# Altium PCB STM32.PcbDoc (part 4 of 10)
Units mil, origin at the board's own origin, x right, y up, seen from the top; angles counter-clockwise.
Board outline 3925 x 3925 mil, 2 copper layers (Top Layer, Bottom Layer); 152 components, 142 nets, 670 pads, 189 vias.
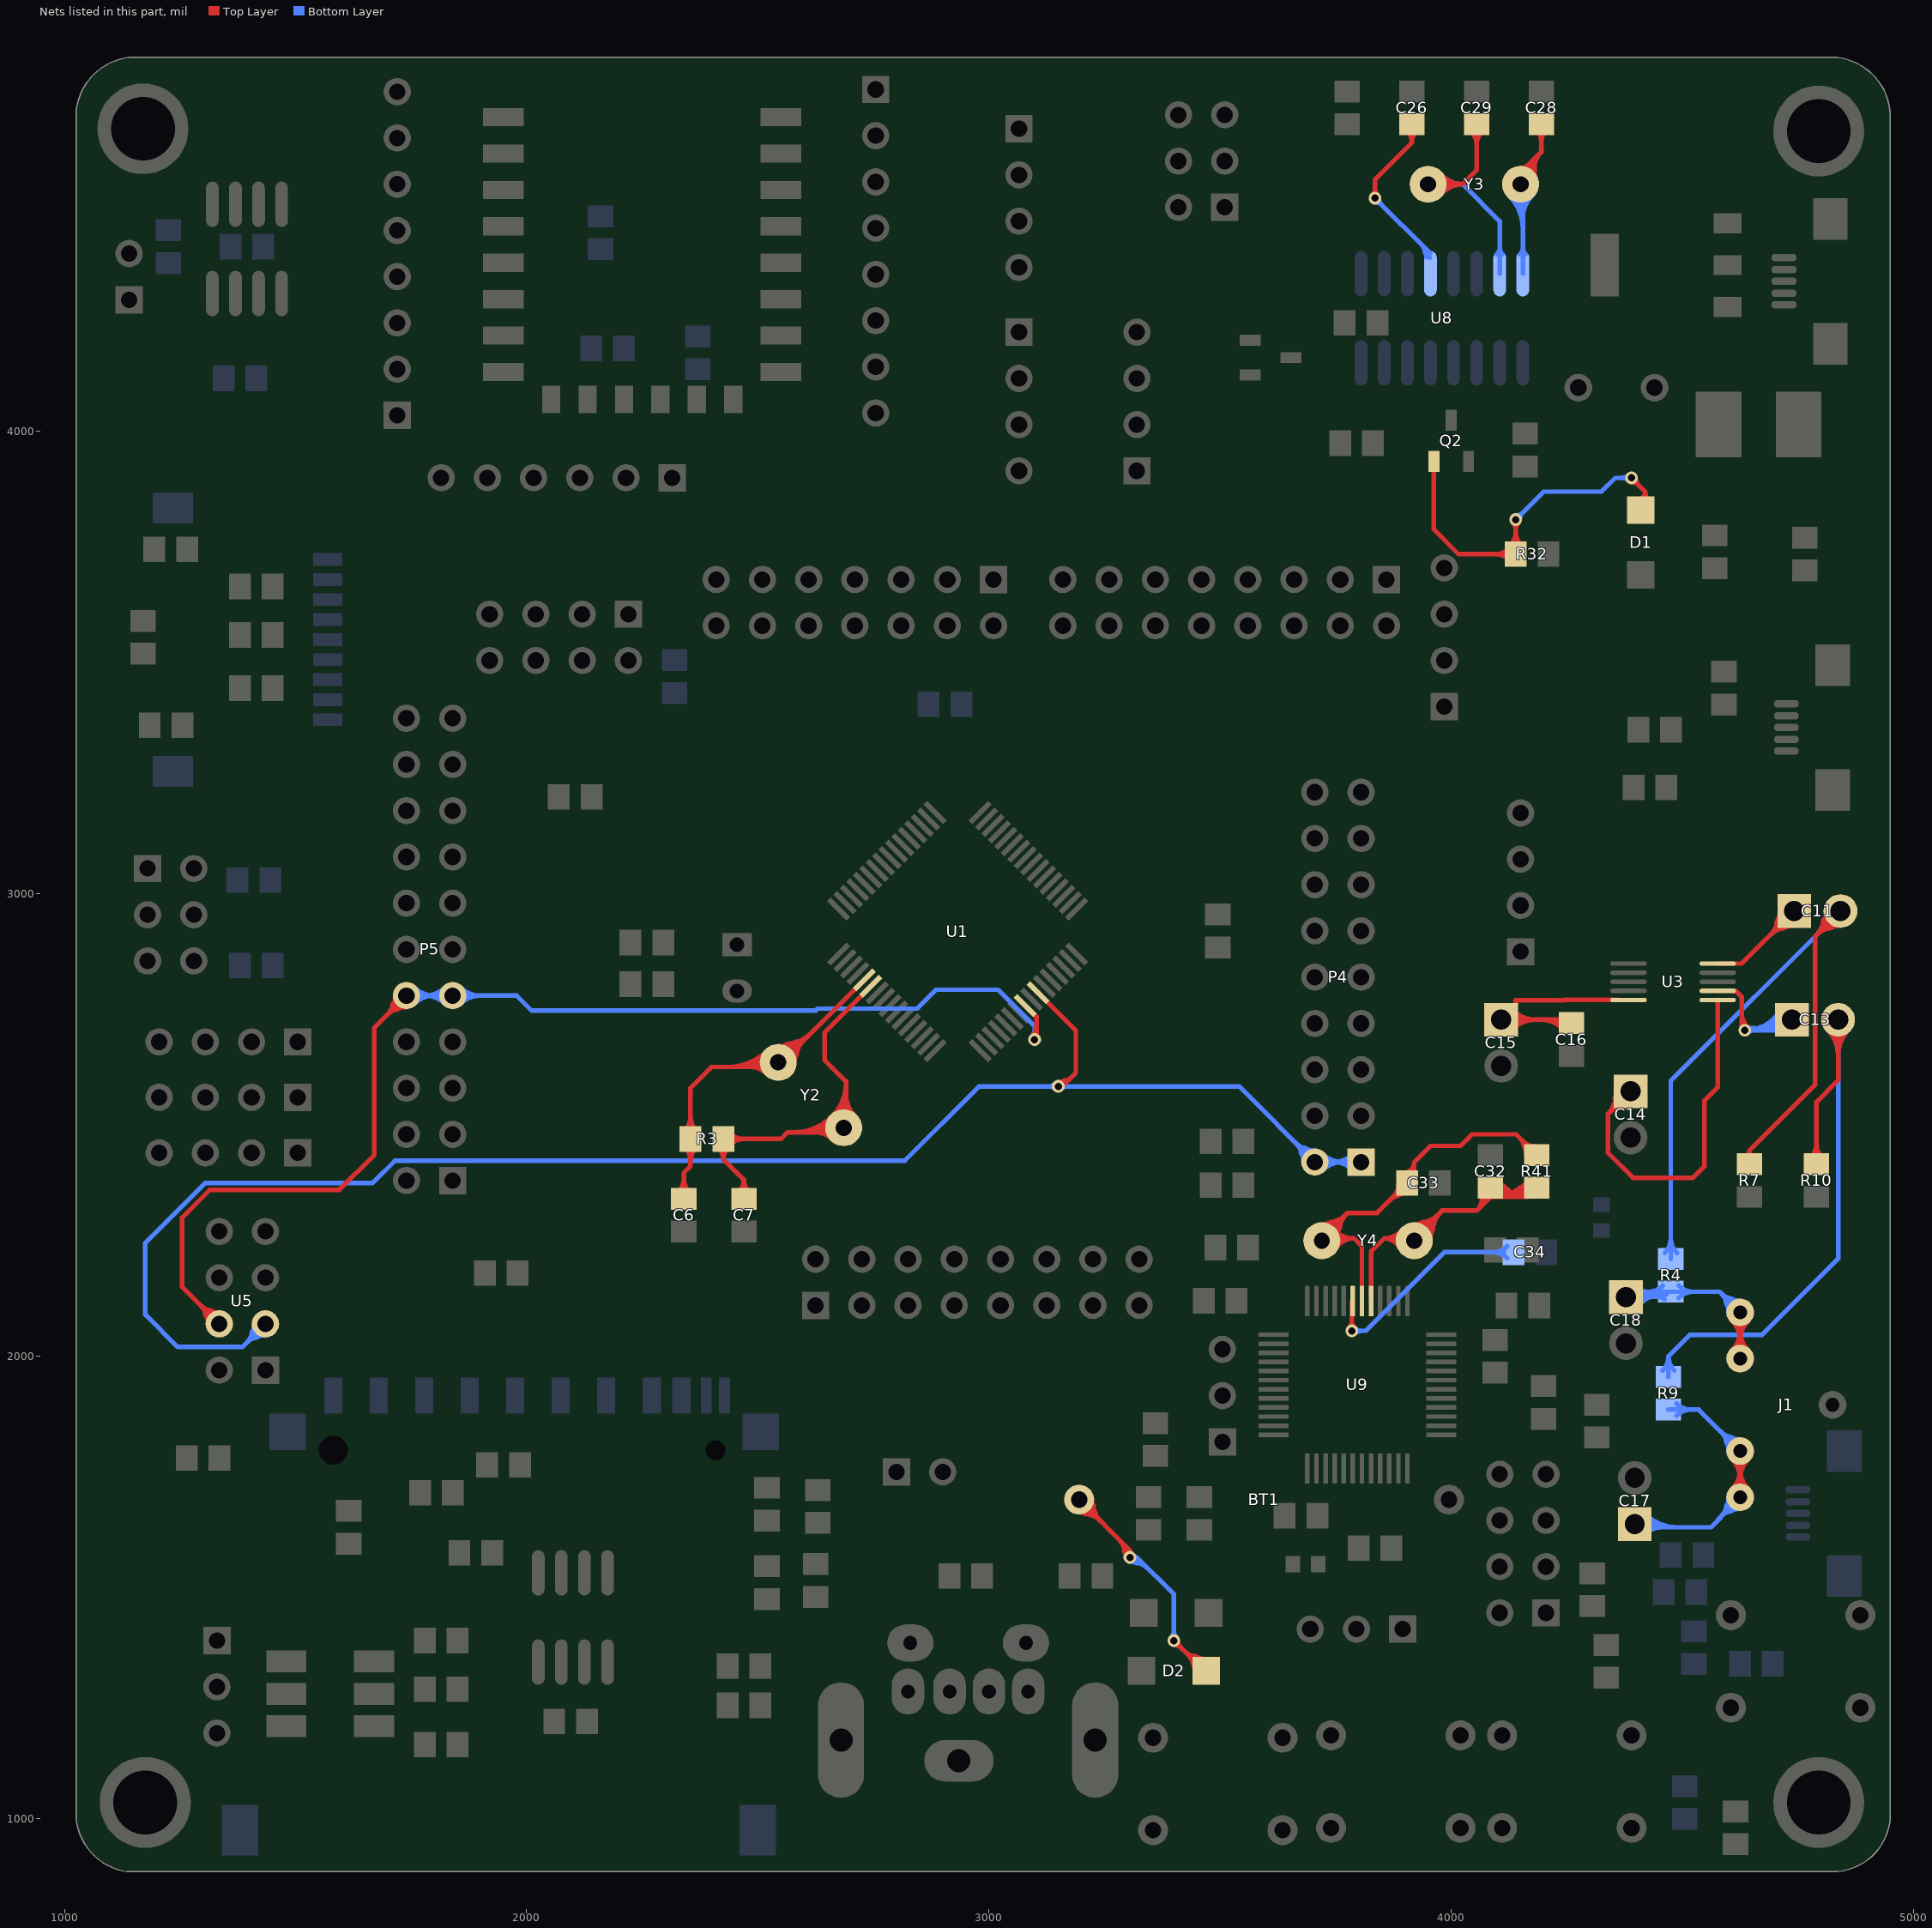
[diagram p4: the nets of this part, all layers, seen from the top]

## Via types
v1: diameter 27.56, hole 15.75, Top Layer to Bottom Layer, tented both sides, 185 vias
v2: diameter 39.37, hole 23.62, Top Layer to Bottom Layer, tented both sides, 3 vias
v3: diameter 39.37, hole 27.56, Top Layer to Bottom Layer, tented both sides, 1 vias

## Nets (pads, with @x,y where several pads share a name; then routed paths per layer and width w, separated by ;. In a path a pad name is that pad's centre, name@x,y a point inside that pad or via, vN(x,y) a via of type N, cw(c..) or ccw(c..) an arc to the next point about the centre after c; other vN are vias at no path point) (continued)
NCE: P4.1 P4.2 U1.26 U5.3 | length 5142.5
  Top Layer w10: U1.26@3106.5,2786.48 3187.99,2705 3187.99,2612.99 3154,2579 v1@3143.74,2579 ; v1@3148.91,2584.3 cw(c3169.61,2573.71) 3163.59,2596.16 ; v1@3150,2592.52 ccw(c3150,2634.82) 3179.91,2604.91 cw(c3150,2634.82) v1@3150,2592.52
  Bottom Layer w10: 1404.48,2047.65 cw(c1441.61,2037.7) U5.3@1433.9,2075.36 ; 1412.65,2039.48 ccw(c1402.7,2076.61) U5.3@1440.36,2068.9 ; U5.3@1435,2070 1385,2020 1245,2020 1175,2090 1175,2245 1305,2375 1667,2375 1715,2423 2818,2423 2978.74,2583.74 3541.26,2583.74 P4.2@3705,2420 P4.1@3805,2420 ; 3674.48,2442.35 ccw(c3711.61,2452.3) P4.2@3703.9,2414.64 ; 3682.65,2450.52 cw(c3672.7,2413.39) P4.2@3710.36,2421.1 ; 1393.13,2028.13 ccw(c1351.26,2070) 1410.47,2070 cw(c1351.26,2070) 1393.13,2028.13 ; 1393.13,2028.13 cw(c1435,1986.26) 1435,2045.47 ccw(c1435,1986.26) 1393.13,2028.13 ; 1410.2,2045.2 ccw(c1385.4,2070) 1420.47,2070 cw(c1385.4,2070) 1410.2,2045.2 ; 1410.2,2045.2 cw(c1435,2020.4) 1435,2055.47 ccw(c1435,2020.4) 1410.2,2045.2 ; 3128.8,2583.74 ccw(c3128.8,2604.94) 3143.79,2589.95 cw(c3128.8,2604.94) 3128.8,2583.74 ; 3128.8,2583.74 cw(c3128.8,2562.54) 3143.79,2577.53 ccw(c3128.8,2562.54) 3128.8,2583.74 ; 3171.2,2583.74 ccw(c3171.2,2562.54) 3156.21,2577.53 cw(c3171.2,2562.54) 3171.2,2583.74 ; 3171.2,2583.74 cw(c3171.2,2604.94) 3156.21,2589.95 ccw(c3171.2,2604.94) 3171.2,2583.74 ; 3663.13,2461.87 ccw(c3705,2503.74) 3705,2444.53 cw(c3705,2503.74) 3663.13,2461.87 ; 3663.13,2461.87 cw(c3621.26,2420) 3680.47,2420 ccw(c3621.26,2420) 3663.13,2461.87 ; 3680.2,2444.8 ccw(c3705,2469.6) 3705,2434.53 cw(c3705,2469.6) 3680.2,2444.8 ; 3680.2,2444.8 cw(c3655.4,2420) 3690.47,2420 ccw(c3655.4,2420) 3680.2,2444.8 ; 3740.07,2420 ccw(c3740.07,2384.93) 3715.27,2409.73 cw(c3740.07,2384.93) 3740.07,2420 ; 3740.07,2420 cw(c3740.07,2455.07) 3715.27,2430.27 ccw(c3740.07,2455.07) 3740.07,2420 ; 3745.79,2420 ccw(c3745.79,2479.21) 3787.66,2437.34 cw(c3745.79,2479.21) 3745.79,2420 ; 3745.79,2420 cw(c3745.79,2360.79) 3787.66,2402.66 ccw(c3745.79,2360.79) 3745.79,2420 ; 3764.21,2420 ccw(c3764.21,2360.79) 3722.34,2402.66 cw(c3764.21,2360.79) 3764.21,2420 ; 3764.21,2420 cw(c3764.21,2479.21) 3722.34,2437.34 ccw(c3764.21,2479.21) 3764.21,2420 ; 3769.93,2420 ccw(c3769.93,2455.07) 3794.73,2430.27 cw(c3769.93,2455.07) 3769.93,2420 ; 3769.93,2420 cw(c3769.93,2384.93) 3794.73,2409.73 ccw(c3769.93,2384.93) 3769.93,2420
  other v1: 3150,2583.74
NCS: P5.9 P5.10 U1.24 U5.4 | length 4452.2
  Top Layer w6: U1.24@3078.66,2758.64 U1.24@3099,2738.31
  Top Layer w10: 1304.48,2092.35 ccw(c1341.61,2102.3) U5.4@1333.9,2064.64 ; 1312.65,2100.52 cw(c1302.7,2063.39) U5.4@1340.36,2071.1 ; U5.4@1335,2070 1255,2150 1255,2300 1315,2360 1595,2360 1670,2435 1670,2710 P5.10@1740,2780 ; 1709.48,2757.65 cw(c1746.61,2747.7) P5.10@1738.9,2785.36 ; 1717.65,2749.48 ccw(c1707.7,2786.61) P5.10@1745.36,2778.9 ; v1(3098.78,2685) 3102.68,2688.9 3102.68,2734.63 U1.24@3099,2738.31 ; 1293.13,2111.87 ccw(c1335,2153.74) 1335,2094.53 cw(c1335,2153.74) 1293.13,2111.87 ; 1293.13,2111.87 cw(c1251.26,2070) 1310.47,2070 ccw(c1251.26,2070) 1293.13,2111.87 ; 1310.2,2094.8 ccw(c1335,2119.6) 1335,2084.53 cw(c1335,2119.6) 1310.2,2094.8 ; 1310.2,2094.8 cw(c1285.4,2070) 1320.47,2070 ccw(c1285.4,2070) 1310.2,2094.8 ; 1698.13,2738.13 ccw(c1656.26,2780) 1715.47,2780 cw(c1656.26,2780) 1698.13,2738.13 ; 1698.13,2738.13 cw(c1740,2696.26) 1740,2755.47 ccw(c1740,2696.26) 1698.13,2738.13 ; 1715.2,2755.2 ccw(c1690.4,2780) 1725.47,2780 cw(c1690.4,2780) 1715.2,2755.2 ; 1715.2,2755.2 cw(c1740,2730.4) 1740,2765.47 ccw(c1740,2730.4) 1715.2,2755.2 ; v1@3092.57,2691.21 ccw(c3068.16,2715.62) 3102.68,2715.62 cw(c3068.16,2715.62) v1@3092.57,2691.21 ; U1.24@3095.42,2740.7 cw(c3093.49,2731.71) 3102.68,2731.71 ccw(c3093.49,2731.71) U1.24@3095.42,2740.7
  Bottom Layer w10: P5.10@1740,2780 P5.9@1840,2780 1978.39,2780 2010.91,2747.48 2625,2747.48 2629.52,2752 2845,2752 2885.74,2792.74 2960.4,2792.74 ; 2970,2792.74 2960.4,2792.74 ; v1(3098.78,2685) 3098.78,2713.52 3019.56,2792.74 2960.4,2792.74 ; 1775.07,2780 ccw(c1775.07,2744.93) 1750.27,2769.73 cw(c1775.07,2744.93) 1775.07,2780 ; 1775.07,2780 cw(c1775.07,2815.07) 1750.27,2790.27 ccw(c1775.07,2815.07) 1775.07,2780 ; 1780.79,2780 ccw(c1780.79,2839.21) 1822.66,2797.34 cw(c1780.79,2839.21) 1780.79,2780 ; 1780.79,2780 cw(c1780.79,2720.79) 1822.66,2762.66 ccw(c1780.79,2720.79) 1780.79,2780 ; 1799.21,2780 ccw(c1799.21,2720.79) 1757.34,2762.66 cw(c1799.21,2720.79) 1799.21,2780 ; 1799.21,2780 cw(c1799.21,2839.21) 1757.34,2797.34 ccw(c1799.21,2839.21) 1799.21,2780 ; 1804.93,2780 ccw(c1804.93,2815.07) 1829.73,2790.27 cw(c1804.93,2815.07) 1804.93,2780 ; 1804.93,2780 cw(c1804.93,2744.93) 1829.73,2769.73 ccw(c1804.93,2744.93) 1804.93,2780 ; 1875.07,2780 ccw(c1875.07,2744.93) 1850.27,2769.73 cw(c1875.07,2744.93) 1875.07,2780 ; 1875.07,2780 cw(c1875.07,2815.07) 1850.27,2790.27 ccw(c1875.07,2815.07) 1875.07,2780 ; 1899.21,2780 ccw(c1899.21,2720.79) 1857.34,2762.66 cw(c1899.21,2720.79) 1899.21,2780 ; 1899.21,2780 cw(c1899.21,2839.21) 1857.34,2797.34 ccw(c1899.21,2839.21) 1899.21,2780 ; 3098.78,2706.2 ccw(c3119.97,2706.2) 3104.98,2691.21 cw(c3119.97,2706.2) 3098.78,2706.2 ; 3098.78,2706.2 cw(c3077.58,2706.2) 3092.57,2691.21 ccw(c3077.58,2706.2) 3098.78,2706.2
NetBT1_1: BT1.1 D2.1 | length 1974.3
  Top Layer w10: BT1.1@3182.78,1687.5 ccw(c3220.02,1695.12) 3210.19,1658.4 ; BT1.1@3192.58,1689.5 ccw(c3237.75,1698.75) 3225.82,1654.22 ; BT1.1@3195,1690 3305,1580 ; BT1.1@3195.5,1692.42 cw(c3186.25,1647.25) 3230.78,1659.18 ; BT1.1@3197.5,1702.22 cw(c3189.88,1664.98) 3226.6,1674.81 ; 3292.27,1579.73 ccw(c3317.39,1586.47) v1@3304.39,1563.94 ; v1@3299.67,1571.98 ccw(c3295.25,1577.77) 3302.29,1579.66 ccw(c3311.52,1582.13) v1@3308.12,1573.21 ; v1(3305,1565) 3305,1580 ; v1@3398.8,1384.76 ccw(c3412.87,1387.64) 3409.15,1373.77 ; v1(3400,1385) 3465,1320 D2.1@3470,1320 ; v1@3400.24,1386.2 cw(c3397.36,1372.13) 3411.23,1375.85 ; 3439.28,1341.33 ccw(c3473.93,1350.61) D2.1@3469.36,1315.04 ; 3443.97,1351.98 cw(c3432.65,1309.73) D2.1@3474.82,1321.33 ; 3224.92,1660.08 ccw(c3195,1630.16) 3195,1672.47 cw(c3195,1630.16) 3224.92,1660.08 ; 3224.92,1660.08 cw(c3254.84,1690) 3212.53,1690 ccw(c3254.84,1690) 3224.92,1660.08 ; 3241.99,1643.01 ccw(c3195,1596.02) 3195,1662.47 cw(c3195,1596.02) 3241.99,1643.01 ; 3241.99,1643.01 cw(c3288.98,1690) 3222.53,1690 ccw(c3288.98,1690) 3241.99,1643.01 ; 3305,1580 ccw(c3313.42,1580) 3309.3,1572.66 cw(c3313.42,1580) 3305,1580 ; 3305,1580 cw(c3296.58,1580) 3300.7,1572.66 ccw(c3296.58,1580) 3305,1580 ; 3414.99,1370.01 ccw(c3400,1355.02) 3400,1376.22 cw(c3400,1355.02) 3414.99,1370.01 ; 3414.99,1370.01 cw(c3429.98,1385) 3408.78,1385 ccw(c3429.98,1385) 3414.99,1370.01 ; 3279.41,1605.59 cw(c3238.81,1565) 3296.22,1565 ccw(c3238.81,1565) 3279.41,1605.59 ; 3296.48,1588.52 cw(c3272.95,1565) 3306.22,1565 ccw(c3272.95,1565) 3296.48,1588.52 ; 3418.79,1366.21 ccw(c3470,1417.43) 3470,1345 cw(c3470,1417.43) 3418.79,1366.21 ; 3430.86,1354.14 cw(c3396.72,1320) 3445,1320 ccw(c3396.72,1320) 3430.86,1354.14 ; 3435.86,1349.14 ccw(c3470,1383.28) 3470,1335 cw(c3470,1383.28) 3435.86,1349.14
  Bottom Layer w10: v1@3303.94,1564.39 ccw(c3326.47,1577.39) 3319.73,1552.27 ; v1(3305,1565) 3320,1565 ; v1@3311.98,1559.67 cw(c3317.77,1555.25) 3319.66,1562.29 cw(c3322.13,1571.52) v1@3313.21,1568.12 ; v1(3400,1385) 3400,1485 3320,1565 ; 3320,1565 ccw(c3320,1556.58) 3312.66,1560.7 cw(c3320,1556.58) 3320,1565 ; 3320,1565 cw(c3320,1573.42) 3312.66,1569.3 ccw(c3320,1573.42) 3320,1565 ; 3400,1406.2 ccw(c3421.2,1406.2) 3406.21,1391.21 cw(c3421.2,1406.2) 3400,1406.2 ; 3400,1406.2 cw(c3378.8,1406.2) 3393.79,1391.21 ccw(c3378.8,1406.2) 3400,1406.2 ; v1@3305,1556.22 cw(c3305,1498.81) 3345.59,1539.41 ccw(c3305,1498.81) v1@3305,1556.22 ; v1@3305,1566.22 cw(c3305,1532.95) 3328.52,1556.48 ccw(c3305,1532.95) v1@3305,1566.22
NetC6_2: C6.2 R3.1 U1.5 Y2.1 | length 3173
  Top Layer w10: C6.2@2340,2340.43 2340,2397 2354.57,2411.57 R3.1@2354.57,2470 2354.57,2580.28 2400,2625.71 ; Y2.1@2529.96,2640.16 cw(c2581.87,2624.04) 2568.77,2676.79 ; Y2.1@2539.52,2637.19 cw(c2601.68,2617.89) 2586,2681.06 ; Y2.1@2544.88,2630.75 ccw(c2538.86,2681.22) 2587.96,2668.06 ; Y2.1@2546.07,2620.82 ccw(c2540.75,2665.42) 2584.14,2653.79 ; Y2.1@2549.24,2635.02 cw(c2591.59,2629.12) 2580.53,2670.42 ; U1.5@2730.68,2814.32 2549.29,2632.93 Y2.1@2549.29,2625.71 ; 2340,2385.39 ccw(c2384.96,2385.39) 2353.17,2353.6 cw(c2384.96,2385.39) 2340,2385.39 ; 2340,2385.39 cw(c2295.04,2385.39) 2326.83,2353.6 ccw(c2295.04,2385.39) 2340,2385.39 ; 2354.57,2421.11 ccw(c2309.61,2421.11) 2341.4,2452.9 cw(c2309.61,2421.11) 2354.57,2421.11 ; 2354.57,2421.11 cw(c2399.53,2421.11) 2367.74,2452.9 ccw(c2399.53,2421.11) 2354.57,2421.11 ; 2354.57,2518.9 ccw(c2399.53,2518.9) 2367.74,2487.11 cw(c2399.53,2518.9) 2354.57,2518.9 ; 2354.57,2518.9 cw(c2309.61,2518.9) 2341.4,2487.11 ccw(c2309.61,2518.9) 2354.57,2518.9 ; 2400,2625.71 Y2.1@2549.29,2625.71 ; 2400,2625.71 Y2.1@2549.29,2625.71 ; 2435.65,2625.71 ccw(c2435.65,2744.35) Y2.1@2519.54,2660.46 ; 2435.65,2625.71 ccw(c2435.65,2744.35) Y2.1@2519.54,2660.46 ; 2435.65,2625.71 ccw(c2435.65,2744.35) Y2.1@2519.54,2660.46 ; 2435.65,2625.71 ccw(c2435.65,2744.35) Y2.1@2519.54,2660.46 ; 2459.79,2625.71 ccw(c2459.79,2720.21) Y2.1@2526.61,2653.39 ; 2459.79,2625.71 ccw(c2459.79,2720.21) Y2.1@2526.61,2653.39 ; 2459.79,2625.71 ccw(c2459.79,2720.21) Y2.1@2526.61,2653.39 ; 2459.79,2625.71 ccw(c2459.79,2720.21) Y2.1@2526.61,2653.39 ; 2483.93,2625.71 ccw(c2483.93,2696.07) Y2.1@2533.68,2646.32 ; 2483.93,2625.71 cw(c2483.93,2575.36) Y2.1@2519.54,2610.96 ; 2483.93,2625.71 ccw(c2483.93,2696.07) Y2.1@2533.68,2646.32 ; 2483.93,2625.71 cw(c2483.93,2575.36) Y2.1@2519.54,2610.96 ; 2483.93,2625.71 ccw(c2483.93,2696.07) Y2.1@2533.68,2646.32 ; 2483.93,2625.71 cw(c2483.93,2575.36) Y2.1@2519.54,2610.96 ; 2483.93,2625.71 ccw(c2483.93,2696.07) Y2.1@2533.68,2646.32 ; 2483.93,2625.71 cw(c2483.93,2575.36) Y2.1@2519.54,2610.96 ; Y2.1@2544.29,2650.71 ccw(c2544.29,2705.7) 2583.17,2666.82 cw(c2544.29,2705.7) Y2.1@2544.29,2650.71 ; Y2.1@2544.29,2660.71 ccw(c2544.29,2739.84) 2600.24,2683.89 cw(c2544.29,2739.84) Y2.1@2544.29,2660.71 ; Y2.1@2544.29,2670.71 ccw(c2544.29,2773.98) 2617.31,2700.96 cw(c2544.29,2773.98) Y2.1@2544.29,2670.71 ; Y2.1@2569.29,2635.71 cw(c2610.87,2635.71) 2581.47,2665.11 ccw(c2610.87,2635.71) Y2.1@2569.29,2635.71 ; Y2.1@2579.29,2635.71 cw(c2645.01,2635.71) 2598.54,2682.18 ccw(c2645.01,2635.71) Y2.1@2579.29,2635.71
NetC7_2: C7.2 R3.2 U1.6 Y2.2 | length 3539.3
  Top Layer w10: C7.2@2470,2340.43 2470,2382 ; U1.6@2744.6,2800.4 2645,2700.8 2645,2640 2690.71,2594.29 ; 2425.43,2426.57 ccw(c2392.86,2426.57) 2413.59,2451.7 cw(c2392.86,2426.57) 2425.43,2426.57 ; 2425.43,2426.57 cw(c2458.01,2426.57) 2437.28,2451.7 ccw(c2458.01,2426.57) 2425.43,2426.57 ; 2425.43,2426.57 2470,2382 ; 2425.43,2426.57 R3.2@2425.43,2470 2550,2470 2564.29,2484.29 ; 2470,2382 ccw(c2507.07,2382) 2482.4,2354.33 cw(c2507.07,2382) 2470,2382 ; 2470,2382 cw(c2432.93,2382) 2457.6,2354.33 ccw(c2432.93,2382) 2470,2382 ; 2470.39,2470 ccw(c2470.39,2425.04) 2438.6,2456.83 cw(c2470.39,2425.04) 2470.39,2470 ; 2470.39,2470 cw(c2470.39,2514.96) 2438.6,2483.17 ccw(c2470.39,2514.96) 2470.39,2470 ; 2564.29,2484.29 Y2.2@2690.71,2484.29 ; 2564.29,2484.29 Y2.2@2690.71,2484.29 ; 2577.07,2484.29 ccw(c2577.07,2602.93) Y2.2@2660.96,2519.04 ; 2577.07,2484.29 ccw(c2577.07,2602.93) Y2.2@2660.96,2519.04 ; 2577.07,2484.29 ccw(c2577.07,2602.93) Y2.2@2660.96,2519.04 ; 2577.07,2484.29 ccw(c2577.07,2602.93) Y2.2@2660.96,2519.04 ; 2601.21,2484.29 ccw(c2601.21,2578.79) Y2.2@2668.03,2511.97 ; 2601.21,2484.29 ccw(c2601.21,2578.79) Y2.2@2668.03,2511.97 ; 2601.21,2484.29 ccw(c2601.21,2578.79) Y2.2@2668.03,2511.97 ; 2601.21,2484.29 ccw(c2601.21,2578.79) Y2.2@2668.03,2511.97 ; 2625.35,2484.29 ccw(c2625.35,2554.65) Y2.2@2675.1,2504.9 ; 2625.35,2484.29 cw(c2625.35,2433.93) Y2.2@2660.96,2469.54 ; 2625.35,2484.29 ccw(c2625.35,2554.65) Y2.2@2675.1,2504.9 ; 2625.35,2484.29 cw(c2625.35,2433.93) Y2.2@2660.96,2469.54 ; 2625.35,2484.29 ccw(c2625.35,2554.65) Y2.2@2675.1,2504.9 ; 2625.35,2484.29 cw(c2625.35,2433.93) Y2.2@2660.96,2469.54 ; 2625.35,2484.29 ccw(c2625.35,2554.65) Y2.2@2675.1,2504.9 ; 2625.35,2484.29 cw(c2625.35,2433.93) Y2.2@2660.96,2469.54 ; Y2.2@2660.96,2519.04 ccw(c2589.14,2590.86) 2690.71,2590.86 ; Y2.2@2660.96,2519.04 ccw(c2589.14,2590.86) 2690.71,2590.86 ; Y2.2@2660.96,2519.04 ccw(c2589.14,2590.86) 2690.71,2590.86 ; Y2.2@2660.96,2519.04 ccw(c2589.14,2590.86) 2690.71,2590.86 ; Y2.2@2668.03,2511.97 ccw(c2613.28,2566.72) 2690.71,2566.72 ; Y2.2@2668.03,2511.97 ccw(c2613.28,2566.72) 2690.71,2566.72 ; Y2.2@2668.03,2511.97 ccw(c2613.28,2566.72) 2690.71,2566.72 ; Y2.2@2668.03,2511.97 ccw(c2613.28,2566.72) 2690.71,2566.72 ; Y2.2@2675.1,2504.9 ccw(c2637.43,2542.57) 2690.71,2542.57 ; Y2.2@2675.1,2504.9 ccw(c2637.43,2542.57) 2690.71,2542.57 ; Y2.2@2675.1,2504.9 ccw(c2637.43,2542.57) 2690.71,2542.57 ; Y2.2@2675.1,2504.9 ccw(c2637.43,2542.57) 2690.71,2542.57 ; Y2.2@2690.71,2484.29 2690.71,2594.29 ; Y2.2@2690.71,2484.29 2690.71,2594.29 ; 2690.71,2542.57 ccw(c2733.99,2542.57) Y2.2@2703.39,2511.97 ; 2690.71,2542.57 ccw(c2733.99,2542.57) Y2.2@2703.39,2511.97 ; 2690.71,2542.57 ccw(c2733.99,2542.57) Y2.2@2703.39,2511.97 ; 2690.71,2542.57 ccw(c2733.99,2542.57) Y2.2@2703.39,2511.97 ; 2690.71,2566.72 ccw(c2758.14,2566.72) Y2.2@2710.46,2519.04 ; 2690.71,2566.72 ccw(c2758.14,2566.72) Y2.2@2710.46,2519.04 ; 2690.71,2566.72 ccw(c2758.14,2566.72) Y2.2@2710.46,2519.04 ; 2690.71,2566.72 ccw(c2758.14,2566.72) Y2.2@2710.46,2519.04
NetC11_1: C11.1 U3.10 | length 960.9
  Top Layer w10: U3.10@4576.46,2849.37 4628.37,2849.37 C11.1@4742,2963 ; 4699.38,2921.2 cw(c4753.53,2906.69) C11.1@4742.28,2961.61 ; 4700.2,2920.38 ccw(c4685.69,2974.53) C11.1@4740.61,2963.28 ; 4703.57,2936.83 cw(c4749.9,2924.42) C11.1@4740.28,2971.41 ; C11.1@4712.06,2953.49 cw(c4686.55,2945.39) 4705.44,2926.44 ; C11.1@4712.04,2953.54 cw(c4686.37,2945.44) 4705.44,2926.44 ; 4715.83,2924.57 ccw(c4703.42,2970.9) C11.1@4750.41,2961.28 ; C11.1@4732.49,2933.06 ccw(c4724.39,2907.55) 4705.44,2926.44 ; C11.1@4732.54,2933.04 ccw(c4724.44,2907.37) 4705.44,2926.44 ; 4688.37,2909.37 ccw(c4634.73,2963) 4710.58,2963 cw(c4634.73,2963) 4688.37,2909.37 ; 4688.37,2909.37 cw(c4742,2855.73) 4742,2931.58 ccw(c4742,2855.73) 4688.37,2909.37 ; 4705.44,2926.44 ccw(c4668.88,2963) 4720.58,2963 cw(c4668.88,2963) 4705.44,2926.44 ; 4705.44,2926.44 cw(c4742,2889.88) 4742,2941.58 ccw(c4742,2889.88) 4705.44,2926.44
NetC11_2: C11.2 R4.2 R7.2 | length 3522.8
  Top Layer w10: R7.2@4645,2415.43 4645,2445 ; 4799.38,2921.2 cw(c4853.53,2906.69) C11.2@4842.28,2961.61 ; 4800.2,2920.38 ccw(c4785.69,2974.53) C11.2@4840.61,2963.28 ; 4803.57,2936.83 cw(c4849.9,2924.42) C11.2@4840.28,2971.41 ; 4806.75,2928.8 cw(c4830.37,2916.29) C11.2@4836.82,2942.22 ; 4807.8,2927.75 ccw(c4795.29,2951.37) C11.2@4821.22,2957.82 ; 4810.23,2935.35 ccw(c4788.87,2946.66) C11.2@4811.97,2953.77 ; C11.2@4812.07,2953.44 cw(c4786.76,2945.34) 4805.58,2926.58 ; C11.2@4812.06,2953.49 cw(c4786.55,2945.39) 4805.44,2926.44 ; C11.2@4812.04,2953.54 cw(c4786.37,2945.44) 4805.44,2926.44 ; C11.2@4812.09,2953.39 cw(c4786.93,2945.3) 4805.58,2926.58 ; 4812.74,2940.09 cw(c4833.55,2929.07) C11.2@4839.24,2951.92 ; 4814.35,2931.23 cw(c4825.66,2909.87) C11.2@4832.77,2932.97 ; 4815.83,2924.57 ccw(c4803.42,2970.9) C11.2@4850.41,2961.28 ; 4819.09,2933.74 ccw(c4808.07,2954.55) C11.2@4830.92,2960.24 ; C11.2@4832.39,2933.09 ccw(c4824.3,2907.93) 4805.58,2926.58 ; C11.2@4832.44,2933.07 ccw(c4824.34,2907.76) 4805.58,2926.58 ; C11.2@4832.49,2933.06 ccw(c4824.39,2907.55) 4805.44,2926.44 ; C11.2@4832.54,2933.04 ccw(c4824.44,2907.37) 4805.44,2926.44 ; C11.2@4842,2963 4787,2908 4787,2587 4645,2445 ; 4645,2445 ccw(c4659.16,2445) 4653.04,2432.23 cw(c4659.16,2445) 4645,2445 ; 4645,2445 cw(c4630.84,2445) 4636.95,2432.23 ccw(c4630.84,2445) 4645,2445 ; 4788.37,2909.37 ccw(c4734.73,2963) 4810.58,2963 cw(c4734.73,2963) 4788.37,2909.37 ; 4788.37,2909.37 cw(c4842,2855.73) 4842,2931.58 ccw(c4842,2855.73) 4788.37,2909.37 ; 4805.44,2926.44 ccw(c4768.88,2963) 4820.58,2963 cw(c4768.88,2963) 4805.44,2926.44 ; 4805.44,2926.44 cw(c4842,2889.88) 4842,2941.58 ccw(c4842,2889.88) 4805.44,2926.44
  Bottom Layer w10: R4.2@4475,2210.43 4475,2596 C11.2@4842,2963 ; 4799.38,2921.2 cw(c4853.53,2906.69) C11.2@4842.28,2961.61 ; 4800.2,2920.38 ccw(c4785.69,2974.53) C11.2@4840.61,2963.28 ; 4803.57,2936.83 cw(c4849.9,2924.42) C11.2@4840.28,2971.41 ; C11.2@4812.06,2953.49 cw(c4786.55,2945.39) 4805.44,2926.44 ; C11.2@4812.04,2953.54 cw(c4786.37,2945.44) 4805.44,2926.44 ; 4815.83,2924.57 ccw(c4803.42,2970.9) C11.2@4850.41,2961.28 ; C11.2@4832.49,2933.06 ccw(c4824.39,2907.55) 4805.44,2926.44 ; C11.2@4832.54,2933.04 ccw(c4824.44,2907.37) 4805.44,2926.44 ; 4475,2255.39 ccw(c4519.96,2255.39) 4488.17,2223.6 cw(c4519.96,2255.39) 4475,2255.39 ; 4475,2255.39 cw(c4430.04,2255.39) 4461.83,2223.6 ccw(c4430.04,2255.39) 4475,2255.39 ; 4788.37,2909.37 ccw(c4734.73,2963) 4810.58,2963 cw(c4734.73,2963) 4788.37,2909.37 ; 4788.37,2909.37 cw(c4842,2855.73) 4842,2931.58 ccw(c4842,2855.73) 4788.37,2909.37 ; 4805.44,2926.44 ccw(c4768.88,2963) 4820.58,2963 cw(c4768.88,2963) 4805.44,2926.44 ; 4805.44,2926.44 cw(c4842,2889.88) 4842,2941.58 ccw(c4842,2889.88) 4805.44,2926.44
NetC13_1: C13.1 U3.7 | length 1078.7
  Top Layer w10: 4619.18,2786.97 ccw(c4610.91,2778.69) U3.7@4610.91,2790.39 ; v1@4629.49,2711.83 ccw(c4622.18,2720.89) 4632.26,2726.71 ; v1(4635,2705) 4628.31,2711.69 4628.31,2777.84 4618.11,2788.03 ; U3.7@4610.89,2790.39 cw(c4612.18,2782.1) 4618.11,2788.03 ; U3.7@4610.89,2790.39 cw(c4612.18,2782.1) 4618.11,2788.03 ; 4628.31,2718.21 ccw(c4648.21,2718.21) 4634.14,2704.14 cw(c4648.21,2718.21) 4628.31,2718.21 ; 4628.31,2742.35 ccw(c4672.35,2742.35) 4641.21,2711.21 cw(c4672.35,2742.35) 4628.31,2742.35
  Bottom Layer w10: C13.1@4737,2728 4714,2705 v1(4635,2705) ; v1(4635,2705) ccw(c4635,2796.38) 4710.9,2745.49 cw(c4635,2796.38) v1(4635,2705) ; v1@4639.54,2712.52 ccw(c4650.5,2730.66) 4655.58,2710.08 ; v1@4639.54,2712.52 ccw(c4650.5,2730.66) 4655.58,2710.08 ; v1@4639.54,2712.52 ccw(c4650.5,2730.66) 4655.58,2710.08 ; v1@4642.52,2700.46 cw(c4660.66,2689.51) 4655.58,2710.08 ; v1@4642.52,2700.46 cw(c4660.66,2689.51) 4655.58,2710.08 ; v1@4642.52,2700.46 cw(c4660.66,2689.51) 4655.58,2710.08 ; 4656.2,2705 ccw(c4656.2,2683.8) 4641.21,2698.79 cw(c4656.2,2683.8) 4656.2,2705 ; 4656.2,2705 cw(c4656.2,2726.2) 4641.21,2711.21 ccw(c4656.2,2726.2) 4656.2,2705 ; 4653.75,2705 ccw(c4653.75,2783.81) 4719.21,2739.93 cw(c4653.75,2783.81) 4653.75,2705 ; 4672.49,2705 ccw(c4672.49,2771.25) 4727.52,2734.36 cw(c4672.49,2771.25) 4672.49,2705 ; 4691.23,2705 ccw(c4691.23,2758.68) 4735.82,2728.79 cw(c4691.23,2758.68) 4691.23,2705
NetC13_2: C13.2 R9.1 R10.2 | length 2425.1
  Top Layer w10: R10.2@4790,2420.43 4790,2550 4837,2597 C13.2@4837,2728 ; 4790,2460.39 ccw(c4834.96,2460.39) 4803.17,2428.6 cw(c4834.96,2460.39) 4790,2460.39 ; 4790,2460.39 cw(c4745.04,2460.39) 4776.83,2428.6 ccw(c4745.04,2460.39) 4790,2460.39 ; 4837,2652.15 ccw(c4761.15,2652.15) 4814.78,2705.78 cw(c4761.15,2652.15) 4837,2652.15 ; 4837,2652.15 cw(c4912.85,2652.15) 4859.22,2705.78 ccw(c4912.85,2652.15) 4837,2652.15 ; 4837,2676.29 ccw(c4785.29,2676.29) 4821.86,2712.86 cw(c4785.29,2676.29) 4837,2676.29 ; 4837,2676.29 cw(c4888.71,2676.29) 4852.14,2712.86 ccw(c4888.71,2676.29) 4837,2676.29
  Bottom Layer w10: R9.1@4470,1955.43 4470,2000 ; C13.2@4837,2728 4837,2211 4672,2046 4516,2046 4470,2000 ; 4470,2000 ccw(c4514.01,2000) 4483.08,1968.68 cw(c4514.01,2000) 4470,2000 ; 4470,2000 cw(c4425.98,2000) 4456.91,1968.68 ccw(c4425.98,2000) 4470,2000 ; 4837,2652.15 ccw(c4761.15,2652.15) 4814.78,2705.78 cw(c4761.15,2652.15) 4837,2652.15 ; 4837,2652.15 cw(c4912.85,2652.15) 4859.22,2705.78 ccw(c4912.85,2652.15) 4837,2652.15 ; 4837,2676.29 ccw(c4785.29,2676.29) 4821.86,2712.86 cw(c4785.29,2676.29) 4837,2676.29 ; 4837,2676.29 cw(c4888.71,2676.29) 4852.14,2712.86 ccw(c4888.71,2676.29) 4837,2676.29
NetC14_1: C14.1 U3.6 | length 1314.3
  Top Layer w10: 4350.48,2539.84 cw(c4405.32,2528.96) C14.1@4384.86,2580.99 ; C14.1@4354.04,2557.79 cw(c4397.36,2549.2) C14.1@4381.2,2590.29 ; 4354.84,2535.48 ccw(c4343.96,2590.32) C14.1@4395.99,2569.86 ; C14.1@4372.79,2539.04 ccw(c4364.2,2582.36) C14.1@4405.29,2566.2 ; C14.1@4388,2573 4339,2524 ; U3.6@4576.46,2770.63 4576.46,2581.46 4548,2553 4548,2411 4523,2386 4393,2386 4339,2440 4339,2524 ; 4339,2524 ccw(c4296.08,2566.93) 4356.65,2570.93 cw(c4296.08,2566.93) 4339,2524 ; 4339,2524 cw(c4381.93,2481.08) 4385.93,2541.65 ccw(c4381.93,2481.08) 4339,2524 ; C14.1@4354.6,2539.6 ccw(c4325.34,2568.86) 4366.63,2571.59 cw(c4325.34,2568.86) C14.1@4354.6,2539.6 ; C14.1@4354.6,2539.6 cw(c4383.86,2510.34) 4386.59,2551.63 ccw(c4383.86,2510.34) C14.1@4354.6,2539.6
NetC15_1: C15.1 C16.1 U3.5 | length 1046.1
  Top Layer w10: C16.1@4260,2720.43 4252.43,2728 C15.1@4108,2728 4139.57,2759.57 4139.57,2770 4245,2770 4245.63,2770.63 4270,2770.63 U3.5@4360,2770.63 ; 4159.71,2728 ccw(c4159.71,2676.29) 4123.14,2712.86 cw(c4159.71,2676.29) 4159.71,2728 ; 4159.71,2728 cw(c4159.71,2779.71) 4123.14,2743.14 ccw(c4159.71,2779.71) 4159.71,2728 ; 4183.85,2728 ccw(c4183.85,2652.15) 4130.22,2705.78 cw(c4183.85,2652.15) 4183.85,2728 ; 4183.85,2728 cw(c4183.85,2803.85) 4130.22,2750.22 ccw(c4183.85,2803.85) 4183.85,2728 ; 4192.84,2728 cw(c4192.84,2657.2) 4242.9,2707.26 ccw(c4192.84,2657.2) 4192.84,2728 ; 4216.98,2728 cw(c4216.98,2681.35) 4249.97,2714.34 ccw(c4216.98,2681.35) 4216.98,2728 ; 4229.38,2728 ccw(c4229.38,2747.12) 4242.9,2733.6 cw(c4229.38,2747.12) 4229.38,2728
NetC17_1: C17.1 J1.2 R9.2 | length 3128.3
  Top Layer w10: J1.2@4625,1695 J1.2@4625,1795 ; 4625,1731.22 ccw(c4661.21,1731.22) 4635.61,1705.61 cw(c4661.21,1731.22) 4625,1731.22 ; 4625,1731.22 cw(c4588.79,1731.22) 4614.39,1705.61 ccw(c4588.79,1731.22) 4625,1731.22 ; 4625,1734.65 ccw(c4564.64,1734.65) 4607.32,1777.32 cw(c4564.64,1734.65) 4625,1734.65 ; 4625,1734.65 cw(c4685.36,1734.65) 4642.68,1777.32 ccw(c4685.36,1734.65) 4625,1734.65 ; 4625,1755.36 ccw(c4685.36,1755.36) 4642.68,1712.68 cw(c4685.36,1755.36) 4625,1755.36 ; 4625,1755.36 cw(c4564.64,1755.36) 4607.32,1712.68 ccw(c4564.64,1755.36) 4625,1755.36 ; 4625,1758.79 ccw(c4588.79,1758.79) 4614.39,1784.4 cw(c4588.79,1758.79) 4625,1758.79 ; 4625,1758.79 cw(c4661.21,1758.79) 4635.61,1784.4 ccw(c4661.21,1758.79) 4625,1758.79
  Bottom Layer w10: R9.2@4470,1884.57 4535.44,1884.57 J1.2@4625,1795 ; 4577,1647 J1.2@4625,1695 ; 4582,1650 4562,1630 ; 4593.65,1671.32 cw(c4631.95,1661.06) J1.2@4624,1699.9 ; 4593.65,1818.68 ccw(c4631.95,1828.94) J1.2@4624,1790.1 ; 4601.32,1663.66 ccw(c4591.06,1701.95) J1.2@4629.9,1694 ; 4601.32,1826.35 cw(c4591.06,1788.05) J1.2@4629.9,1796.01 ; C17.1@4405.07,1645.07 ccw(c4441.46,1681.46) 4441.46,1630 ; C17.1@4405.07,1645.07 ccw(c4441.46,1681.46) 4441.46,1630 ; C17.1@4405.07,1645.07 ccw(c4441.46,1681.46) 4441.46,1630 ; C17.1@4405.07,1645.07 ccw(c4441.46,1681.46) 4441.46,1630 ; C17.1@4412.14,1652.14 ccw(c4465.61,1705.61) 4465.61,1630 ; C17.1@4412.14,1652.14 ccw(c4465.61,1705.61) 4465.61,1630 ; C17.1@4412.14,1652.14 ccw(c4465.61,1705.61) 4465.61,1630 ; C17.1@4412.14,1652.14 ccw(c4465.61,1705.61) 4465.61,1630 ; C17.1@4419.22,1614.78 cw(c4455.95,1578.05) 4455.95,1630 ; C17.1@4419.22,1614.78 cw(c4455.95,1578.05) 4455.95,1630 ; C17.1@4419.22,1614.78 cw(c4455.95,1578.05) 4455.95,1630 ; C17.1@4419.22,1614.78 cw(c4455.95,1578.05) 4455.95,1630 ; C17.1@4419.22,1659.22 ccw(c4489.75,1729.75) 4489.75,1630 ; C17.1@4419.22,1659.22 ccw(c4489.75,1729.75) 4489.75,1630 ; C17.1@4419.22,1659.22 ccw(c4489.75,1729.75) 4489.75,1630 ; C17.1@4419.22,1659.22 ccw(c4489.75,1729.75) 4489.75,1630 ; 4518.89,1884.57 ccw(c4518.89,1839.61) 4487.1,1871.4 cw(c4518.89,1839.61) 4518.89,1884.57 ; 4518.89,1884.57 cw(c4518.89,1929.52) 4487.1,1897.73 ccw(c4518.89,1929.52) 4518.89,1884.57 ; 4562,1630 4395,1630 4562,1630 ; 4582.32,1652.32 ccw(c4539.64,1695) 4600,1695 cw(c4539.64,1695) 4582.32,1652.32 ; 4582.32,1652.32 cw(c4625,1609.65) 4625,1670 ccw(c4625,1609.65) 4582.32,1652.32 ; 4582.32,1837.68 ccw(c4625,1880.36) 4625,1820 cw(c4625,1880.36) 4582.32,1837.68 ; 4582.32,1837.68 cw(c4539.64,1795) 4600,1795 ccw(c4539.64,1795) 4582.32,1837.68 ; 4599.39,1669.4 ccw(c4573.79,1695) 4610,1695 cw(c4573.79,1695) 4599.39,1669.4 ; 4599.39,1669.4 cw(c4625,1643.79) 4625,1680 ccw(c4625,1643.79) 4599.39,1669.4 ; 4599.39,1820.61 ccw(c4625,1846.22) 4625,1810 cw(c4625,1846.22) 4599.39,1820.61 ; 4599.39,1820.61 cw(c4573.79,1795) 4610,1795 ccw(c4573.79,1795) 4599.39,1820.61
NetC18_1: C18.1 J1.3 R4.1 | length 3727.6
  Top Layer w10: J1.3@4625,1995 J1.3@4625,2095 ; 4625,2031.22 ccw(c4661.21,2031.22) 4635.61,2005.61 cw(c4661.21,2031.22) 4625,2031.22 ; 4625,2031.22 cw(c4588.79,2031.22) 4614.39,2005.61 ccw(c4588.79,2031.22) 4625,2031.22 ; 4625,2034.65 ccw(c4564.64,2034.65) 4607.32,2077.32 cw(c4564.64,2034.65) 4625,2034.65 ; 4625,2034.65 cw(c4685.36,2034.65) 4642.68,2077.32 ccw(c4685.36,2034.65) 4625,2034.65 ; 4625,2055.36 ccw(c4685.36,2055.36) 4642.68,2012.68 cw(c4685.36,2055.36) 4625,2055.36 ; 4625,2055.36 cw(c4564.64,2055.36) 4607.32,2012.68 ccw(c4564.64,2055.36) 4625,2055.36 ; 4625,2058.79 ccw(c4588.79,2058.79) 4614.39,2084.4 cw(c4588.79,2058.79) 4625,2058.79 ; 4625,2058.79 cw(c4661.21,2058.79) 4635.61,2084.4 ccw(c4661.21,2058.79) 4625,2058.79
  Bottom Layer w10: 4593.65,2118.68 ccw(c4631.95,2128.94) J1.3@4624,2090.1 ; 4601.32,2126.35 cw(c4591.06,2088.05) J1.3@4629.9,2096.01 ; J1.3@4625,2095 4580.43,2139.57 R4.1@4475,2139.57 ; C18.1@4386.46,2120.33 cw(c4429.87,2080.98) 4429.87,2139.57 ; C18.1@4386.46,2120.33 cw(c4429.87,2080.98) 4429.87,2139.57 ; C18.1@4386.46,2120.33 cw(c4429.87,2080.98) 4429.87,2139.57 ; C18.1@4386.46,2120.33 cw(c4429.87,2080.98) 4429.87,2139.57 ; C18.1@4393.87,2113.61 cw(c4452.43,2060.52) R4.1@4452.43,2139.57 ; C18.1@4393.87,2113.61 cw(c4452.43,2060.52) R4.1@4452.43,2139.57 ; C18.1@4393.87,2113.61 cw(c4452.43,2060.52) R4.1@4452.43,2139.57 ; C18.1@4393.87,2113.61 cw(c4452.43,2060.52) R4.1@4452.43,2139.57 ; C18.1@4400.22,2150.22 ccw(c4425.92,2175.92) 4425.92,2139.57 ; C18.1@4400.22,2150.22 ccw(c4425.92,2175.92) 4425.92,2139.57 ; C18.1@4400.22,2150.22 ccw(c4425.92,2175.92) 4425.92,2139.57 ; C18.1@4400.22,2150.22 ccw(c4425.92,2175.92) 4425.92,2139.57 ; C18.1@4401.28,2106.9 cw(c4474.99,2040.06) R4.1@4475,2139.57 ; C18.1@4401.28,2106.9 cw(c4474.99,2040.06) R4.1@4475,2139.57 ; C18.1@4401.28,2106.9 cw(c4474.99,2040.06) R4.1@4475,2139.57 ; C18.1@4401.28,2106.9 cw(c4474.99,2040.06) R4.1@4475,2139.57 ; 4425.53,2126.31 ccw(c4412.99,2173.09) R4.1@4454.94,2148.88 ; 4425.53,2126.31 ccw(c4412.99,2173.09) R4.1@4454.94,2148.88 ; 4425.53,2126.31 ccw(c4412.99,2173.09) R4.1@4454.94,2148.88 ; 4425.53,2126.31 ccw(c4412.99,2173.09) R4.1@4454.94,2148.88 ; 4425.53,2126.31 ccw(c4412.99,2173.09) R4.1@4454.94,2148.88 ; 4425.53,2126.31 ccw(c4412.99,2173.09) R4.1@4454.94,2148.88 ; 4426.11,2139.57 ccw(c4426.11,2184.53) R4.1@4457.9,2152.74 ; 4426.11,2139.57 cw(c4426.11,2094.61) R4.1@4457.9,2126.4 ; 4426.11,2139.57 ccw(c4426.11,2184.53) R4.1@4457.9,2152.74 ; 4426.11,2139.57 cw(c4426.11,2094.61) R4.1@4457.9,2126.4 ; 4426.11,2139.57 ccw(c4426.11,2184.53) R4.1@4457.9,2152.74 ; 4426.11,2139.57 cw(c4426.11,2094.61) R4.1@4457.9,2126.4 ; 4426.11,2139.57 ccw(c4426.11,2184.53) R4.1@4457.9,2152.74 ; 4426.11,2139.57 cw(c4426.11,2094.61) R4.1@4457.9,2126.4 ; 4426.71,2133.73 cw(c4434.76,2098.27) R4.1@4458.77,2125.58 ; 4426.71,2133.73 cw(c4434.76,2098.27) R4.1@4458.77,2125.58 ; 4426.71,2133.73 cw(c4434.76,2098.27) R4.1@4458.77,2125.58 ; 4426.71,2133.73 cw(c4434.76,2098.27) R4.1@4458.77,2125.58 ; 4426.71,2133.73 cw(c4434.76,2098.27) R4.1@4458.77,2125.58 ; 4426.71,2133.73 cw(c4434.76,2098.27) R4.1@4458.77,2125.58 ; 4430.27,2127.59 cw(c4441.01,2087.52) R4.1@4461.75,2123.44 ; 4430.27,2127.59 cw(c4441.01,2087.52) R4.1@4461.75,2123.44 ; 4430.27,2127.59 cw(c4441.01,2087.52) R4.1@4461.75,2123.44 ; 4430.27,2127.59 cw(c4441.01,2087.52) R4.1@4461.75,2123.44 ; 4430.27,2127.59 cw(c4441.01,2087.52) R4.1@4461.75,2123.44 ; 4430.27,2127.59 cw(c4441.01,2087.52) R4.1@4461.75,2123.44 ; 4436.02,2135.84 ccw(c4429.18,2165.95) R4.1@4455.31,2149.49 ; 4436.02,2135.84 ccw(c4429.18,2165.95) R4.1@4455.31,2149.49 ; 4436.02,2135.84 ccw(c4429.18,2165.95) R4.1@4455.31,2149.49 ; 4436.02,2135.84 ccw(c4429.18,2165.95) R4.1@4455.31,2149.49 ; 4436.02,2135.84 ccw(c4429.18,2165.95) R4.1@4455.31,2149.49 ; 4436.02,2135.84 ccw(c4429.18,2165.95) R4.1@4455.31,2149.49 ; 4445.81,2138.07 cw(c4450.72,2116.42) R4.1@4465.37,2133.09 ; 4445.81,2138.07 cw(c4450.72,2116.42) R4.1@4465.37,2133.09 ; 4445.81,2138.07 cw(c4450.72,2116.42) R4.1@4465.37,2133.09 ; 4445.81,2138.07 cw(c4450.72,2116.42) R4.1@4465.37,2133.09 ; 4445.81,2138.07 cw(c4450.72,2116.42) R4.1@4465.37,2133.09 ; 4445.81,2138.07 cw(c4450.72,2116.42) R4.1@4465.37,2133.09 ; R4.1@4475,2139.57 4359.57,2139.57 R4.1@4475,2139.57 ; 4523.89,2139.57 ccw(c4523.89,2094.61) 4492.1,2126.4 cw(c4523.89,2094.61) 4523.89,2139.57 ; 4523.89,2139.57 cw(c4523.89,2184.53) 4492.1,2152.74 ccw(c4523.89,2184.53) 4523.89,2139.57 ; 4582.32,2137.68 ccw(c4625,2180.36) 4625,2120 cw(c4625,2180.36) 4582.32,2137.68 ; 4582.32,2137.68 cw(c4539.64,2095) 4600,2095 ccw(c4539.64,2095) 4582.32,2137.68 ; 4599.39,2120.61 ccw(c4625,2146.22) 4625,2110 cw(c4625,2146.22) 4599.39,2120.61 ; 4599.39,2120.61 cw(c4573.79,2095) 4610,2095 ccw(c4573.79,2095) 4599.39,2120.61
NetC26_1: C26.1 U8.4 | length 694
  Top Layer w10: v1(3835,4505) 3835,4545 3915,4625 ; C26.1@3915,4664.57 3915,4625 ; 3835,4526.2 ccw(c3856.2,4526.2) 3841.21,4511.21 cw(c3856.2,4526.2) 3835,4526.2 ; 3835,4526.2 cw(c3813.8,4526.2) 3828.79,4511.21 ccw(c3813.8,4526.2) 3835,4526.2 ; 3915,4625 ccw(c3882.28,4625) 3903.13,4650.22 cw(c3882.28,4625) 3915,4625 ; 3915,4625 cw(c3947.72,4625) 3926.87,4650.22 ccw(c3947.72,4625) 3915,4625
  Bottom Layer w10: v1(3835,4505) U8.4@3955,4385 ; 3942.66,4390.16 ccw(c3964.4,4395.99) U8.4@3954.46,4375.79 ; 3849.99,4490.01 ccw(c3835,4475.02) 3835,4496.22 cw(c3835,4475.02) 3849.99,4490.01 ; 3849.99,4490.01 cw(c3864.98,4505) 3843.78,4505 ccw(c3864.98,4505) 3849.99,4490.01 ; 3934.28,4405.72 cw(c3905.44,4376.89) 3946.22,4376.89 ccw(c3905.44,4376.89) 3934.28,4405.72
NetC28_2: C28.2 U8.8 Y3.1 | length 1590.3
  Top Layer w10: Y3.1@4135.09,4533.35 cw(c4172.02,4537.44) 4162.4,4573.32 ; Y3.1@4150,4535 4150,4560 4195,4605 ; Y3.1@4159.32,4523.25 ccw(c4124.71,4566.89) 4180.12,4572.59 ; C28.2@4195,4669.57 4195,4605 ; 4195,4605 ccw(c4233.25,4566.75) 4182.7,4547.47 cw(c4233.25,4566.75) 4195,4605 ; 4195,4624.61 ccw(c4150.04,4624.61) 4181.83,4656.4 cw(c4150.04,4624.61) 4195,4624.61 ; 4195,4624.61 cw(c4239.96,4624.61) 4208.17,4656.4 ccw(c4239.96,4624.61) 4195,4624.61 ; Y3.1@4150,4570 ccw(c4150,4594.14) 4167.07,4577.07 cw(c4150,4594.14) Y3.1@4150,4570 ; Y3.1@4155,4510 4155,4535 Y3.1@4155,4510 ; Y3.1@4164.02,4540.34 cw(c4201.64,4554.69) 4173.17,4583.17 ccw(c4201.64,4554.69) Y3.1@4164.02,4540.34 ; Y3.1@4173.36,4543.91 cw(c4217.45,4560.72) 4184.08,4594.08 ccw(c4217.45,4560.72) Y3.1@4173.36,4543.91
  Bottom Layer w10: U8.8@4155,4341.46 Y3.1@4155,4510 ; 4155,4398.08 ccw(c4176.2,4398.08) 4161.21,4383.1 cw(c4176.2,4398.08) 4155,4398.08 ; 4155,4398.08 cw(c4133.8,4398.08) 4148.79,4383.1 ccw(c4133.8,4398.08) 4155,4398.08 ; 4155,4462.57 ccw(c4077.57,4462.57) 4132.32,4517.32 cw(c4077.57,4462.57) 4155,4462.57 ; 4155,4462.57 cw(c4222.43,4462.57) 4174.75,4510.25 ccw(c4222.43,4462.57) 4155,4462.57 ; 4155,4486.72 ccw(c4101.72,4486.72) 4139.39,4524.39 cw(c4101.72,4486.72) 4155,4486.72 ; 4155,4486.72 cw(c4198.28,4486.72) 4167.68,4517.32 ccw(c4198.28,4486.72) 4155,4486.72 ; Y3.1@4125.25,4510.25 cw(c4053.43,4438.43) 4155,4438.43 ccw(c4053.43,4438.43) Y3.1@4125.25,4510.25
NetC29_2: C29.2 U8.7 Y3.2 | length 1479.2
  Top Layer w10: Y3.2@3950,4535 4025,4535 ; C29.2@4055,4664.57 4055,4565 4025,4535 ; 4003.57,4535 ccw(c4003.57,4490.11) 3969.16,4518.94 cw(c4003.57,4490.11) 4003.57,4535 ; 4003.57,4535 cw(c4003.57,4579.89) 3969.16,4551.06 ccw(c4003.57,4579.89) 4003.57,4535 ; 4025,4535 ccw(c4025,4472.15) 3976.83,4512.52 cw(c4025,4472.15) 4025,4535 ; 4025,4535 cw(c4025,4597.85) 3976.83,4557.48 ccw(c4025,4597.85) 4025,4535 ; 4055,4619.61 ccw(c4010.04,4619.61) 4041.83,4651.4 cw(c4010.04,4619.61) 4055,4619.61 ; 4055,4619.61 cw(c4099.96,4619.61) 4068.17,4651.4 ccw(c4099.96,4619.61) 4055,4619.61
  Bottom Layer w10: Y3.2@3950,4535 4025,4535 ; U8.7@4105,4341.46 4105,4455 4025,4535 ; 4003.57,4535 ccw(c4003.57,4490.11) 3969.16,4518.94 cw(c4003.57,4490.11) 4003.57,4535 ; 4003.57,4535 cw(c4003.57,4579.89) 3969.16,4551.06 ccw(c4003.57,4579.89) 4003.57,4535 ; 4025,4535 ccw(c4025,4472.15) 3976.83,4512.52 cw(c4025,4472.15) 4025,4535 ; 4025,4535 cw(c4025,4597.85) 3976.83,4557.48 ccw(c4025,4597.85) 4025,4535 ; 4105,4398.08 ccw(c4126.2,4398.08) 4111.21,4383.1 cw(c4126.2,4398.08) 4105,4398.08 ; 4105,4398.08 cw(c4083.8,4398.08) 4098.79,4383.1 ccw(c4083.8,4398.08) 4105,4398.08
NetC32_2: C32.2 R41.1 U9.5 Y4.1 | length 4747
  Top Layer w10: U9.5@3826.55,2119.58 3826.55,2226.55 3855,2255 ; Y4.1@3905.17,2252.24 cw(c3950.99,2245.33) 3939,2290.09 ; Y4.1@3915.06,2250.75 cw(c3967.47,2242.84) 3953.75,2294.04 ; Y4.1@3919.1,2254.92 ccw(c3911.34,2297.37) 3953.41,2287.75 ; Y4.1@3921.61,2245.27 ccw(c3900.4,2307.48) 3964.48,2292.82 ; Y4.1@3924.84,2235.8 ccw(c3907.2,2287.53) 3960.48,2275.34 ; C32.2@4065.72,2343.38 cw(c4086.09,2346.07) C32.2@4080.7,2365.9 ; R41.1@4185,2364.57 R41.1@4165,2344.57 ; 3855,2255 ccw(c3855,2305.41) Y4.1@3893.37,2272.71 ; 3855,2255 cw(c3855,2217.19) Y4.1@3888.75,2234.23 ; 3855,2255 ccw(c3855,2305.41) Y4.1@3893.37,2272.71 ; 3855,2255 cw(c3855,2217.19) Y4.1@3888.75,2234.23 ; 3855,2255 ccw(c3855,2305.41) Y4.1@3893.37,2272.71 ; 3855,2255 cw(c3855,2217.19) Y4.1@3888.75,2234.23 ; 3855,2255 ccw(c3855,2305.41) Y4.1@3893.37,2272.71 ; 3855,2255 cw(c3855,2217.19) Y4.1@3888.75,2234.23 ; 3855,2255 Y4.1@3920,2255 ; 3855,2255 Y4.1@3920,2255 ; 3871.25,2255 cw(c3871.25,2225.39) Y4.1@3897.68,2238.73 ; 3871.25,2255 cw(c3871.25,2225.39) Y4.1@3897.68,2238.73 ; 3871.25,2255 cw(c3871.25,2225.39) Y4.1@3897.68,2238.73 ; 3871.25,2255 cw(c3871.25,2225.39) Y4.1@3897.68,2238.73 ; 3876.67,2255 ccw(c3876.67,2286.94) Y4.1@3900.98,2266.22 ; 3876.67,2255 ccw(c3876.67,2286.94) Y4.1@3900.98,2266.22 ; 3876.67,2255 ccw(c3876.67,2286.94) Y4.1@3900.98,2266.22 ; 3876.67,2255 ccw(c3876.67,2286.94) Y4.1@3900.98,2266.22 ; Y4.1@3920,2255 3980,2315 ; 3980,2315 ccw(c4040.54,2254.45) 3954.98,2251.29 cw(c4040.54,2254.45) 3980,2315 ; 3980,2315 4055.43,2315 ; 4055.44,2315 ccw(c4027.92,2342.52) 4063.86,2357.43 cw(c4027.92,2342.52) 4055.44,2315 ; 4055.43,2315 C32.2@4085,2344.57 ; C32.2@4079.75,2357.85 ccw(c4105.92,2376.97) C32.2@4105.92,2344.57 ; C32.2@4079.75,2357.85 ccw(c4105.92,2376.97) C32.2@4105.92,2344.57 ; C32.2@4079.75,2357.85 ccw(c4105.92,2376.97) C32.2@4105.92,2344.57 ; C32.2@4079.75,2357.85 ccw(c4105.92,2376.97) C32.2@4105.92,2344.57 ; C32.2@4085,2344.57 R41.1@4165,2344.57 ; C32.2@4085,2344.57 R41.1@4165,2344.57 ; C32.2@4087.82,2344.57 ccw(c4087.82,2457.81) R41.1@4167.9,2377.74 ; C32.2@4087.82,2344.57 ccw(c4087.82,2457.81) R41.1@4167.9,2377.74 ; C32.2@4087.82,2344.57 ccw(c4087.82,2457.81) R41.1@4167.9,2377.74 ; C32.2@4087.82,2344.57 ccw(c4087.82,2457.81) R41.1@4167.9,2377.74 ; C32.2@4087.82,2363.75 ccw(c4125.61,2391.37) 4125.61,2344.57 ; C32.2@4087.82,2363.75 ccw(c4125.61,2391.37) 4125.61,2344.57 ; C32.2@4087.82,2363.75 ccw(c4125.61,2391.37) 4125.61,2344.57 ; C32.2@4087.82,2363.75 ccw(c4125.61,2391.37) 4125.61,2344.57 ; C32.2@4095.9,2369.65 ccw(c4145.3,2405.76) 4145.3,2344.57 ; C32.2@4095.9,2369.65 ccw(c4145.3,2405.76) 4145.3,2344.57 ; C32.2@4095.9,2369.65 ccw(c4145.3,2405.76) 4145.3,2344.57 ; C32.2@4095.9,2369.65 ccw(c4145.3,2405.76) 4145.3,2344.57 ; C32.2@4103.97,2375.55 ccw(c4165,2420.15) R41.1@4165,2344.57 ; C32.2@4103.97,2375.55 ccw(c4165,2420.15) R41.1@4165,2344.57 ; C32.2@4103.97,2375.55 ccw(c4165,2420.15) R41.1@4165,2344.57 ; C32.2@4103.97,2375.55 ccw(c4165,2420.15) R41.1@4165,2344.57 ; C32.2@4111.96,2344.57 ccw(c4111.96,2433.67) R41.1@4174.97,2370.66 ; C32.2@4111.96,2344.57 ccw(c4111.96,2433.67) R41.1@4174.97,2370.66 ; C32.2@4111.96,2344.57 ccw(c4111.96,2433.67) R41.1@4174.97,2370.66 ; C32.2@4111.96,2344.57 ccw(c4111.96,2433.67) R41.1@4174.97,2370.66 ; 4136.1,2344.57 ccw(c4136.1,2409.53) R41.1@4182.04,2363.59 ; 4136.1,2344.57 ccw(c4136.1,2409.53) R41.1@4182.04,2363.59 ; 4136.1,2344.57 ccw(c4136.1,2409.53) R41.1@4182.04,2363.59 ; 4136.1,2344.57 ccw(c4136.1,2409.53) R41.1@4182.04,2363.59 ; 4152.25,2346.4 ccw(c4142.06,2364.05) 4162.44,2364.32 cw(c4142.06,2364.05) 4152.25,2346.4 ; 4152.25,2346.4 cw(c4164.01,2326.02) 4173.53,2347.54 ccw(c4164.01,2326.02) 4152.25,2346.4 ; R41.1@4160.24,2344.57 ccw(c4160.24,2385.39) R41.1@4189.11,2356.52 ; R41.1@4160.24,2344.57 ccw(c4160.24,2385.39) R41.1@4189.11,2356.52 ; R41.1@4160.24,2344.57 ccw(c4160.24,2385.39) R41.1@4189.11,2356.52 ; R41.1@4160.24,2344.57 ccw(c4160.24,2385.39) R41.1@4189.11,2356.52 ; Y4.1@3920,2275 ccw(c3920,2323.28) 3954.14,2289.14 cw(c3920,2323.28) Y4.1@3920,2275 ; Y4.1@3920,2285 ccw(c3920,2357.43) 3971.21,2306.21 cw(c3920,2357.43) Y4.1@3920,2285 ; Y4.1@3934.99,2250.55 cw(c3977.98,2252.14) 3947.56,2282.56 ccw(c3977.98,2252.14) Y4.1@3934.99,2250.55 ; Y4.1@3944.98,2250.92 cw(c4009.26,2253.3) 3963.78,2298.78 ccw(c4009.26,2253.3) Y4.1@3944.98,2250.92 ; 4066.01,2325.58 ccw(c4042.87,2348.72) 4073.1,2361.26 cw(c4042.87,2348.72) 4066.01,2325.58 ; 4076.59,2336.15 ccw(c4057.82,2354.92) 4082.34,2365.09 cw(c4057.82,2354.92) 4076.59,2336.15 ; C32.2@4087.94,2365.52 cw(c4102.06,2351.92) 4114.36,2367.19 ccw(c4102.06,2351.92) C32.2@4087.94,2365.52 ; C32.2@4095.15,2358.58 cw(c4109.97,2344.31) 4122.87,2360.33 ccw(c4109.97,2344.31) C32.2@4095.15,2358.58 ; C32.2@4101.21,2350.56 cw(c4110.4,2340.06) 4119.15,2350.93 ccw(c4110.4,2340.06) C32.2@4101.21,2350.56 ; C32.2@4102.35,2351.65 cw(c4117.87,2336.69) 4131.39,2353.48 ccw(c4117.87,2336.69) C32.2@4102.35,2351.65 ; C32.2@4107.45,2366.56 ccw(c4123.88,2368.34) 4113.52,2355.47 cw(c4123.88,2368.34) C32.2@4107.45,2366.56 ; 4137.63,2357.46 cw(c4149.62,2339.56) 4166.49,2352.97 ccw(c4149.62,2339.56) 4137.63,2357.46 ; 4139.19,2350.01 cw(c4154.2,2324) 4170.78,2349.04 ccw(c4154.2,2324) 4139.19,2350.01 ; 4146.65,2363.5 cw(c4158.14,2346.34) 4174.32,2359.2 ccw(c4158.14,2346.34) 4146.65,2363.5 ; 4153.18,2358.09 cw(c4164.17,2339.05) 4176.3,2357.38 ccw(c4164.17,2339.05) 4153.18,2358.09 ; 4155.38,2359.35 ccw(c4147.12,2373.66) 4163.08,2369.39 cw(c4147.12,2373.66) 4155.38,2359.35 ; 4155.66,2369.54 cw(c4166.67,2353.12) 4182.14,2365.43 ccw(c4166.67,2353.12) 4155.66,2369.54
NetC33_2: C33.2 R41.2 U9.6 Y4.2 | length 2745
  Top Layer w10: Y4.2@3705.17,2252.24 cw(c3750.99,2245.33) 3739,2290.09 ; Y4.2@3715.06,2250.75 cw(c3767.47,2242.84) 3753.75,2294.04 ; Y4.2@3721.89,2245.37 ccw(c3704.81,2287.14) 3749.35,2279.86 ; Y4.2@3727.55,2237.04 ccw(c3693.97,2294.67) 3759.8,2283.91 ; U9.6@3806.87,2119.58 3806.87,2238.13 3790,2255 ; 3881.1,2346.15 ccw(c3871.99,2380.15) C33.2@3905.89,2370.69 ; 4156.15,2458.9 ccw(c4190.15,2468.01) R41.2@4180.69,2434.11 ; R41.2@4185,2435.43 4140.43,2480 4045,2480 4020,2455 3955,2455 3920,2420 ; Y4.2@3720,2255 3790,2255 ; Y4.2@3720,2255 3790,2255 ; Y4.2@3720,2255 3775,2310 ; Y4.2@3738.1,2267.24 ccw(c3766.66,2294.44) 3766.66,2255 ; Y4.2@3738.1,2267.24 ccw(c3766.66,2294.44) 3766.66,2255 ; Y4.2@3738.1,2267.24 ccw(c3766.66,2294.44) 3766.66,2255 ; Y4.2@3738.1,2267.24 ccw(c3766.66,2294.44) 3766.66,2255 ; Y4.2@3741.54,2237.31 cw(c3772.5,2219.07) 3772.5,2255 ; Y4.2@3741.54,2237.31 cw(c3772.5,2219.07) 3772.5,2255 ; Y4.2@3741.54,2237.31 cw(c3772.5,2219.07) 3772.5,2255 ; Y4.2@3741.54,2237.31 cw(c3772.5,2219.07) 3772.5,2255 ; Y4.2@3745.35,2274.14 ccw(c3790,2316.66) 3790,2255 ; Y4.2@3745.35,2274.14 ccw(c3790,2316.66) 3790,2255 ; Y4.2@3745.35,2274.14 ccw(c3790,2316.66) 3790,2255 ; Y4.2@3745.35,2274.14 ccw(c3790,2316.66) 3790,2255 ; Y4.2@3750.15,2232.23 cw(c3790,2208.76) 3790,2255 ; Y4.2@3750.15,2232.23 cw(c3790,2208.76) 3790,2255 ; Y4.2@3750.15,2232.23 cw(c3790,2208.76) 3790,2255 ; Y4.2@3750.15,2232.23 cw(c3790,2208.76) 3790,2255 ; 3775,2310 ccw(c3824.53,2260.46) 3754.83,2253.48 cw(c3824.53,2260.46) 3775,2310 ; 3775,2310 3839.57,2310 C33.2@3904.57,2375 3920,2390.43 3920,2420 ; 3920,2420 cw(c3896.84,2420) 3901.12,2397.24 ccw(c3896.84,2420) 3920,2420 ; Y4.2@3720,2275 ccw(c3720,2323.28) 3754.14,2289.14 cw(c3720,2323.28) Y4.2@3720,2275 ; Y4.2@3720,2285 ccw(c3720,2357.43) 3771.21,2306.21 cw(c3720,2357.43) Y4.2@3720,2285 ; Y4.2@3744.88,2252.49 cw(c3797.41,2257.75) 3760.08,2295.08 ccw(c3797.41,2257.75) Y4.2@3744.88,2252.49 ; 3866.06,2336.49 cw(c3904.57,2297.98) 3904.57,2352.44 ccw(c3904.57,2297.98) 3866.06,2336.49 ; 3875.56,2345.99 ccw(c3850.49,2371.06) 3885.94,2371.06 cw(c3850.49,2371.06) 3875.56,2345.99 ; C33.2@3883.13,2353.56 cw(c3904.57,2332.12) 3904.57,2362.44 ccw(c3904.57,2332.12) C33.2@3883.13,2353.56 ; C33.2@3902.97,2387.41 ccw(c3899.11,2407.94) 3920,2407.94 cw(c3899.11,2407.94) C33.2@3902.97,2387.41 ; 4146.49,2473.94 cw(c4107.98,2435.43) 4162.44,2435.43 ccw(c4107.98,2435.43) 4146.49,2473.94 ; 4155.99,2464.44 ccw(c4181.06,2489.51) 4181.06,2454.06 cw(c4181.06,2489.51) 4155.99,2464.44 ; R41.2@4163.56,2456.87 cw(c4142.12,2435.43) 4172.44,2435.43 ccw(c4142.12,2435.43) R41.2@4163.56,2456.87
NetC34_2: C34.2 U9.7 | length 753.5
  Top Layer w10: v1@3785,2050 U9.7@3785,2117.39 ; 3785,2076.2 ccw(c3806.2,2076.2) 3791.21,2061.21 cw(c3806.2,2076.2) 3785,2076.2 ; 3785,2076.2 cw(c3763.8,2076.2) 3778.79,2061.21 ccw(c3763.8,2076.2) 3785,2076.2 ; 3785,2086.81 cw(c3792.45,2086.81) 3787.18,2092.08 ccw(c3792.45,2086.81) 3785,2086.81
  Bottom Layer w10: v1(3785,2055) 3815,2055 3985,2225 C34.2@4114.57,2225 ; 3806.2,2055 ccw(c3806.2,2033.8) 3791.21,2048.79 cw(c3806.2,2033.8) 3806.2,2055 ; 3806.2,2055 cw(c3806.2,2076.2) 3791.21,2061.21 ccw(c3806.2,2076.2) 3806.2,2055 ; 4089.61,2225 ccw(c4089.61,2269.96) 4121.4,2238.17 cw(c4089.61,2269.96) 4089.61,2225 ; 4089.61,2225 cw(c4089.61,2180.04) 4121.4,2211.83 ccw(c4089.61,2180.04) 4089.61,2225
NetD1_2: D1.2 Q2.1 R32.2 | length 1511.4
  Top Layer w10: Q2.1@3962.6,3935.71 3962.6,3788.4 4016,3735 R32.2@4139.57,3735 v1(4139.57,3809.57) ; v1@4388.8,3899.78 ccw(c4402.53,3902.32) 4398.91,3888.83 ; v1@4389.76,3899.76 4420,3869.53 ; v1@4390.27,3901.19 cw(c4387.04,3886.79) 4401.3,3890.61 ; D1.2@4410,3830 4420,3840 4420,3869.53 ; 3962.6,3908.44 ccw(c3946.15,3908.44) 3957.78,3920.07 cw(c3946.15,3908.44) 3962.6,3908.44 ; 3962.6,3908.44 cw(c3979.04,3908.44) 3967.41,3920.07 ccw(c3979.04,3908.44) 3962.6,3908.44 ; 4094.61,3735 ccw(c4094.61,3779.96) 4126.4,3748.17 cw(c4094.61,3779.96) 4094.61,3735 ; 4094.61,3735 cw(c4094.61,3690.04) 4126.4,3721.83 ccw(c4094.61,3690.04) 4094.61,3735 ; 4139.57,3783.89 ccw(c4184.52,3783.89) 4152.73,3752.1 cw(c4184.52,3783.89) 4139.57,3783.89 ; 4139.57,3783.89 cw(c4094.61,3783.89) 4126.4,3752.1 ccw(c4094.61,3783.89) 4139.57,3783.89 ; 4139.57,3788.37 ccw(c4118.37,3788.37) 4133.36,3803.36 cw(c4118.37,3788.37) 4139.57,3788.37 ; 4139.57,3788.37 cw(c4160.76,3788.37) 4145.77,3803.36 ccw(c4160.76,3788.37) 4139.57,3788.37 ; 4420,3869.53 cw(c4405.18,3869.53) 4406.97,3854.82 ccw(c4405.18,3869.53) 4420,3869.53 ; v1@4390,3891.22 cw(c4390,3871.16) 4404.18,3885.35 ccw(c4390,3871.16) v1@4390,3891.22 ; v1@4398.78,3900 ccw(c4421.11,3900) 4405.32,3884.21 cw(c4421.11,3900) v1@4398.78,3900 ; 4420,3866.21 ccw(c4446.21,3866.21) 4427.68,3847.68 cw(c4446.21,3866.21) 4420,3866.21
  Bottom Layer w10: v1(4139.57,3809.57) 4200,3870 4325,3870 4354.76,3899.76 v1@4389.76,3899.76 ; 4154.55,3824.55 ccw(c4169.54,3809.57) 4148.35,3809.57 cw(c4169.54,3809.57) 4154.55,3824.55 ; 4154.55,3824.55 cw(c4139.57,3839.54) 4139.57,3818.35 ccw(c4139.57,3839.54) 4154.55,3824.55 ; 4368.23,3899.76 ccw(c4368.23,3921.77) 4383.79,3906.21 cw(c4368.23,3921.77) 4368.23,3899.76 ; 4369.37,3899.76 cw(c4369.37,3879.37) 4383.79,3893.79 ccw(c4369.37,3879.37) 4369.37,3899.76
  other v1: 4390,3900